# Altium PCB e-puck3-camera-2L-VL.PcbDoc
Units mm, origin at the board's own origin, x right, y up, seen from the top; angles counter-clockwise.
Board outline 7.8 x 15.9 mm, 4 copper layers (Top Layer, Layer 1, Layer 2, Bottom Layer), stack 0.603 mm thick; 8 components, 29 nets, 115 pads, 65 vias.
Unrouted connection lines stored in the file: 55.
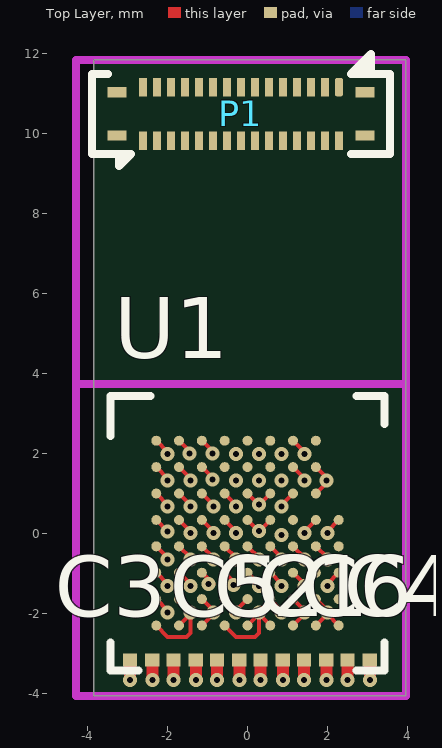
[diagram p0: Top Layer view]
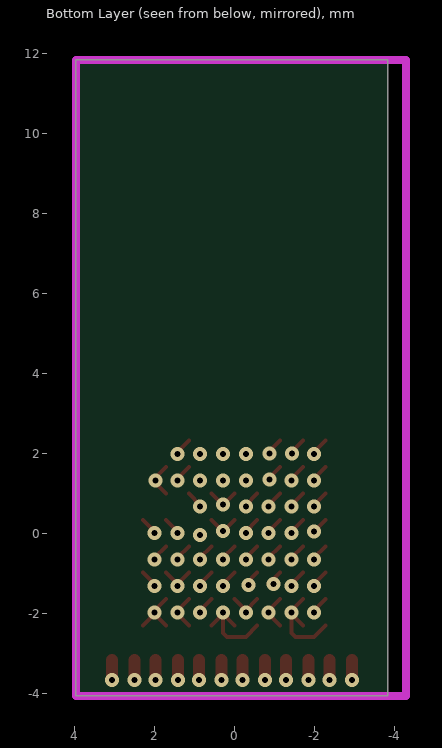
[diagram p1: Bottom Layer view, seen from below]
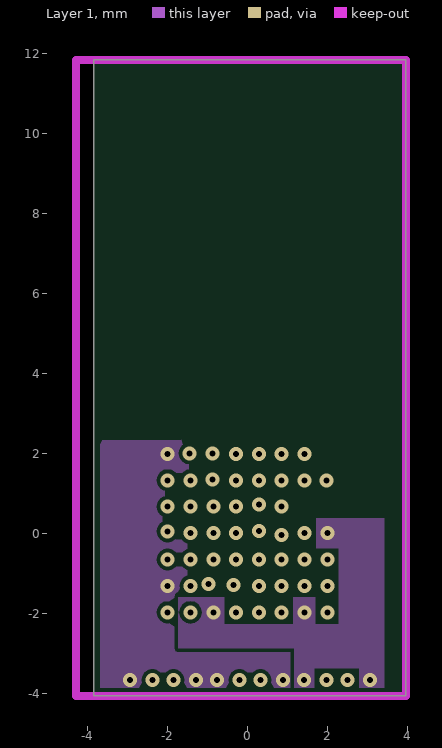
[diagram p2: Layer 1]

## Layer stack, top to bottom
Top Solder: solder mask 0.0102, Solder Resist, Dk 3.5
Top Layer: signal copper 0.0356
Dielectric 1: prepreg 0.0711, PP-006, Dk 4.1
Layer 1: signal copper 0.035
Dielectric1: dielectric 0.32, FR-4, Dk 4.8
Layer 2: signal copper 0.035
Dielectric 2: prepreg 0.0711, PP-006, Dk 4.1
Bottom Layer: signal copper 0.0356
Bottom Solder: solder mask 0.0102, Solder Resist, Dk 3.5

## Board outline
-3.838,-4.071 -3.838,11.829 3.962,11.829 3.962,-4.071

## Design rules (kind name [scope] priority, off if disabled: settings)
AcuteAngle [All] p1 off: minimum=8.80000000000000E+0001 checktracksonly=FALSE
Clearance Clearance_Normal [All] p1: gap=0.1 ignorepadtopadclearanceinfootprint=FALSE
ComponentClearance [All] p1: gap=0.2 collisioncheckmode=3 verticalgap=0.2 showdistances=FALSE
FabricationTestPointUsage TestPointUsage [All] p1: valid=0 allowmultiple=FALSE
FabricationTestpoint Testpoint [All] p1: side=3 testpointundercomponent=TRUE minsize=1.016 maxsize=2.54 preferedsize=1.524 minholesize=0 maxholesize=1.016 preferedholesize=0.813 testpointgrid=0.025 allowsidetop=TRUE allowsidebottom=TRUE usegrid=TRUE gridtolerance=0
Height [All] p1 off: minheight=0 maxheight=25.4 prefheight=12.7
HoleSize [All] p1: absolutevalues=TRUE maxlimit=6 minlimit=0.15 maxpercent=80.000 minpercent=20.000
MinimumAnnularRing [All] p1: minimumring=0.1
MinimumSolderMaskSliver [All] p1: minsoldermaskwidth=0.2
PlaneClearance [All] p1: clearance=0.4
PlaneConnect [All] p1: planeconnectstyle=Relief reliefexpansion=0.508 reliefentries=4 reliefconductorwidth=0.2 reliefairgap=0.254
PolygonConnect PolygonConnect_Via [IsVia] p1: connectstyle=Direct reliefconductorwidth=0.254 reliefentries=4 polygonreliefangle="90 Angle" airgapwidth=0.254
PolygonConnect [All] p2: connectstyle=Relief reliefconductorwidth=0.2 reliefentries=4 polygonreliefangle="90 Angle" airgapwidth=0.254
RoutingCorners [All] p1: cornerstyle=45-Degree minsetback=1 maxsetback=2.54
RoutingVias [All] p1: holewidth=0.3 width=0.6 viastyle="Through Hole" minholewidth=0.15 minwidth=0.35 maxholewidth=1 maxwidth=4
SMDToCorner [All] p1 off: distance=78740
SMDToPlane [All] p1 off: distance=118110
SilkToSilkClearance [All] p1: silktosilkclearance=0.2
SilkToSolderMaskClearance SilkscreenOverComponentPads [IsPad] p1: minsilkscreentomaskgap=0.2 clearancetoexposedcopper=TRUE
SolderMaskExpansion SolderMaskExpansion_Via [isVia] p1: expansion=-5
SolderMaskExpansion [All] p2: expansion=0.03
ViasUnderSMD [All] p1: allowed=FALSE
Width [All] p1: maxlimit=5 minlimit=0.1 preferedwidth=0.254 toplayer_prefwidth=0.1 midlayer1_minwidth=0.254 midlayer1_maxwidth=0.254 midlayer2_minwidth=0.254 midlayer2_maxwidth=0.254 bottomlayer_prefwidth=0.1 minimp=50.000000 maximp=50.000000 favimp=50.000000
19 further rules are at their usual default settings.

## Classes and differential pairs
net class HighFreq: D0 D1 D2 D3 D4 D5 D6 D7 D8 D9 D10 D11 HSYNC MCLK PIXCLK VSYNC
net class D[0..11]: D0 D1 D2 D3 D4 D5 D6 D7 D8 D9 D10 D11
net class DigitalPowers: D1V2 D3V0 DGND
net class AnalogPowers: A3V0 AGND

## Components (designator, comment, footprint, x,y, rotation, side; value= is the part's Value field where it differs from the comment)
C1 "4.7uF" CAPC0201(0603)33_L 0.606,-3.171 r0 top
C2 "100nF" CAPC0201(0603)33_L -0.482,-3.171 r180 top
C3 "4.7uF" CAPC0201(0603)33_L -2.658,-3.171 r180 top
C4 "4.7uF" CAPC0201(0603)33_L 2.782,-3.171 r0 top
C5 "100nF" CAPC0201(0603)33_L -1.57,-3.171 r0 top
C6 "100nF" CAPC0201(0603)33_L 1.694,-3.171 r180 top
P1 "HIROSE_BM23FR0.6-30DP-0.35V" HIROSE_BM23FR0.6-30DP-0.35V -0.163,10.479 r270 top
U1 "AR0144CS" ONSEMI-ODCSP69_570BBV 0,0 r0 top locked

## Footprints (in the part's own frame and the unit in brackets; to place one, negate y for a bottom-side part, rotate by r counter-clockwise, add the part's x,y. Pads: shape width x height; smd on the part's side, far side on the other; paste and mask are expansions set on the pad)
CAPC0201(0603)33_L [mm] "Chip Capacitor, Body 0.6x0.3mm, Height 0.33mm, IPC High Density"
  rect 0.36x0.32 smd: 1(-0.28,0) 2(0.28,0)
  body extent -0.32,-0.17 0.32,0.17, height 0.33
HIROSE_BM23FR0.6-30DP-0.35V [mm] "Hirose header BM23FR0.6 Serie, 30 leads, Plug Vertical SMT"
  rrect50% 0.46x0.2 smd mask+0.05: 1(-0.67,2.45)
  rect 0.46x0.2 smd mask+0.05: 2(-0.67,2.1) 3(-0.67,1.75) 4(-0.67,1.4) 5(-0.67,1.05) 6(-0.67,0.7) 7(-0.67,0.35) 8(-0.67,0) 9(-0.67,-0.35) 10(-0.67,-0.7) 11(-0.67,-1.05) 12(-0.67,-1.4) 13(-0.67,-1.75) 14(-0.67,-2.1) 15(-0.67,-2.45) 16(0.67,-2.45) 17(0.67,-2.1) 18(0.67,-1.75) 19(0.67,-1.4) 20(0.67,-1.05) 21(0.67,-0.7) 22(0.67,-0.35) 23(0.67,0) 24(0.67,0.35) 25(0.67,0.7) 26(0.67,1.05) 27(0.67,1.4) 28(0.67,1.75) 29(0.67,2.1) 30(0.67,2.45)
  rect 0.26x0.47 smd mask+0.05: P1(-0.54,3.1) P1(0.54,3.1) P2(-0.54,-3.1) P2(0.54,-3.1)
  silkscreen extent -1.5,-3.72 1.3,3.72, body extent -0.75,-3.48 0.75,3.47, height 0.52
ONSEMI-ODCSP69_570BBV [mm] "ODCSP69 5.545x5.565, CASE 570BV, ISSUE B"
  round 0.25 smd mask+0.065: A1(-2.28,2.31) A2(-1.71,2.31) A3(-1.14,2.31) A4(-0.57,2.31) A5(0,2.31) A6(0.57,2.31) A7(1.14,2.31) A8(1.71,2.31) B1(-2.28,1.65) B2(-1.71,1.65) B3(-1.14,1.65) B4(-0.57,1.65) B5(0,1.65) B6(0.57,1.65) B7(1.14,1.65) B8(1.71,1.65) C1(-2.28,0.99) C2(-1.71,0.99) C3(-1.14,0.99) C4(-0.57,0.99) C5(0,0.99) C6(0.57,0.99) C7(1.14,0.99) C8(1.71,0.99) D1(-2.28,0.33) D2(-1.71,0.33) D3(-1.14,0.33) D4(-0.57,0.33) D5(0,0.33) D6(0.57,0.33) D7(1.14,0.33) D8(1.71,0.33) D9(2.28,0.33) E1(-2.28,-0.33) E2(-1.71,-0.33) E3(-1.14,-0.33) E4(-0.57,-0.33) E5(0,-0.33) E6(0.57,-0.33) E7(1.14,-0.33) E8(1.71,-0.33) E9(2.28,-0.33) F1(-2.28,-0.99) F2(-1.71,-0.99) F3(-1.14,-0.99) F4(-0.57,-0.99) F5(0,-0.99) F6(0.57,-0.99) F7(1.14,-0.99) F8(1.71,-0.99) F9(2.28,-0.99) G1(-2.28,-1.65) G2(-1.71,-1.65) G3(-1.14,-1.65) G4(-0.57,-1.65) G5(0,-1.65) G6(0.57,-1.65) G7(1.14,-1.65) G8(1.71,-1.65) G9(2.28,-1.65) H1(-2.28,-2.31) H2(-1.71,-2.31) H3(-1.14,-2.31) H4(-0.57,-2.31) H5(0,-2.31) H6(0.57,-2.31) H7(1.14,-2.31) H8(1.71,-2.31) H9(2.28,-2.31)
  silkscreen extent -3.42,-3.43 3.42,3.43, body extent -2.77,-2.78 2.77,2.78, height 1.27

## Part data
C1 C3 C4: library part "TBD Capacitor[[/\]]0201[[/\]]1", "Capacitor TBD 0201", Case/Package=0201, Case Code (Metric)=0603, Currentie=CHF, Dielectric=X5R, Manufacturer=Murata, Manufacturer Part Number=GRM035R60J475ME15D, Max Operating Temperature=85°C, Min Operating Temperature=-55°C, Supplier Part Number 1=490-13230-1-ND, Tolerance=20%, Voltage Rating=6.3V, Capacitance=4.7uF, Case Code (Imperial)=0201, ComponentLink1Description=http://search.murata.co.jp/Ceramy/image/img/A01X/G101/ENG/GRM035R60J475ME15-01.pdf?src-supplier=Digi-Key, ComponentLink1URL=http://search.murata.co.jp/Ceramy/image/img/A01X/G101/ENG/GRM035R60J475ME15-01.pdf?src-supplier=Digi-Key, DateLastUpdate="2018-10-19 / 8:59:52 AM", Footprint Acort=0201, Length=0.024inch, Mount="Surface Mount", Packaging="Tape and Reel", Preference=1, Pricing 1="1=0.44000, 10=0.30700, 100=0.18420, 500=0.13818, 1000=0.11668, 2500=0.11054, 5000=0.10440 (USD)", ROHS=True, Size=0201, Stock 1=1746304, Supplier 1=Digi-Key, Thickness=0.022inch, Voltage Rating (DC)=6.3V, Width=0.012inch
C2 C5 C6: library part "TBD Capacitor[[/\]]0201[[/\]]1", "Capacitor TBD 0201", Currentie=CHF, DateLastUpdate="2018-10-19 / 8:59:52 AM", Footprint Acort=0201, Preference=1, ROHS=True, Size=0201
P1: library part HIROSE_BM23FR0.6-30DP-0.35V[[/\]]1, "2 x 15 Hirose header BM23FR0.6 Serie, 0.35 pitch, SMD, Mate at 0.6mm with receptacle, 0.3A signal contacts", Currentie=CHF, Manufacturer=Hirose, Manufacturer Nr=BM23FR0.6-30DP-0.35V, ComponentLink1Description="Supplier link", ComponentLink1URL=https://www.hirose.com/product/series/BM23FR?lang=en, DateLastUpdate="2019-09-24 / 11:10:53 AM", Footprint Acort=ToDefine, Orientation=Vertical, Preference=1, Price_1=1.03, Quant_1=1, ROHS=True, Supplier=Mouser, Supplier Nr=798-3FR0630DP035V895, Type=SMD
U1: library part AR0144CS[[/\]]1, "AR0144CS 1/4-inch 1.0 Mp CMOS Digital Image Sensor with Global Shutter", Currentie=CHF, Manufacturer=OnSemiconductor, Manufacturer Nr=ToDefine, ComponentLink1Description="OnSemiconductor link", ComponentLink1URL=https://www.onsemi.com/PowerSolutions/search.do?searchType=others&query=AR0144, DateLastUpdate="2019-09-20 / 2:14:32 PM", Footprint Acort=ToDefine, Preference=1, ROHS=True, Size=SOIC16, Supplier=Farnell, Supplier Nr=ToDefine

## Via types
v1: diameter 0.35, hole 0.15, Top Layer to Bottom Layer, tented both sides, 65 vias

## Nets (pads, with @x,y where several pads share a name; then routed paths per layer and width w, separated by ;. In a path a pad name is that pad's centre, name@x,y a point inside that pad or via, vN(x,y) a via of type N, cw(c..) or ccw(c..) an arc to the next point about the centre after c; other vN are vias at no path point)
/OE: P1.27 U1.D7
  other v1: 0.855,-0.045
/RST: P1.26 U1.G1 | length 0.4
  Top Layer w0.1: U1.G1 v1@-1.995,-1.935
  other v1: -1.995,-1.98
A3V0: C4.1 C6.1 P1.20 U1.G2 U1.G8 U1.H1 U1.H2 U1.H8 U1.H9 | length 4.6
  Top Layer w0.1: U1.H1 -1.994,-2.596 -1.523,-2.596 -1.425,-2.498 -1.425,-2.025 U1.H2 ; U1.G2 v1@-1.425,-1.935 ; U1.H8 v1@1.995,-2.025 ; U1.G8 1.995,-1.935 v1(1.995,-1.98) v1@1.995,-2.025 ; U1.H9 v1@1.995,-2.025
  Top Layer w0.3: v1(1.974,-3.671) C6.1 ; v1(2.502,-3.671) C4.1
  other v1: -1.425,-1.98
ADDR: P1.28 U1.B7 | length 0.4
  Top Layer w0.1: U1.B7 v1@1.425,1.365
  other v1: 1.425,1.32
AGND: C4.2 C6.2 P1.18 U1.D9 U1.G3 U1.G7 U1.H3 U1.H7 | length 3.1
  Top Layer w0.1: U1.H3 v1@-0.855,-2.025 ; U1.G3 v1@-0.855,-1.935 ; U1.H7 1.425,-2.025 v1(1.425,-1.98) 1.425,-1.935 U1.G7 ; v1@1.995,0.045 U1.D9
  Top Layer w0.3: v1(1.414,-3.671) C6.2 ; v1(3.062,-3.671) C4.2
  other v1: -0.855,-1.98 1.995,0
D0: P1.12 U1.F5 | length 0.4
  Top Layer w0.1: U1.F5 v1@0.285,-1.275
  other v1: 0.285,-1.32
D1: P1.11 U1.F4 | length 0.4
  Top Layer w0.1: U1.F4 v1@-0.285,-1.275
  other v1: -0.35,-1.3
D1V2: C1.1 C2.1 P1.21 U1.A3 U1.B2 U1.C5 U1.C6 U1.D8 U1.F2 U1.G4 U1.G5 U1.G6 | length 4.6
  Top Layer w0.1: U1.F2 v1@-1.425,-1.275 ; U1.B2 v1@-1.425,1.365 ; U1.A3 v1@-0.855,2.025 ; U1.G4 -0.285,-1.935 U1.G5 ; U1.C5 0.285,0.705 U1.C6 ; U1.G6 v1@0.855,-1.935 ; v1@1.425,0.045 U1.D8
  Top Layer w0.3: v1(-0.202,-3.671) C2.1 ; v1(0.326,-3.671) C1.1
  other v1: -0.285,-1.98 0.855,-1.98 -1.425,-1.32 1.425,0 0.285,0.71 -1.425,1.32 -0.875,1.995
D2: P1.10 U1.F3 | length 0.4
  Top Layer w0.1: U1.F3 v1@-0.855,-1.275
  other v1: -0.975,-1.275
D3: P1.9 U1.E5 | length 0.4
  Top Layer w0.1: U1.E5 v1@0.285,-0.615
  other v1: 0.285,-0.66
D3V0: C3.1 C5.1 P1.19 U1.A2 U1.B8 U1.C2 U1.C8 U1.E3 U1.F9 | length 3.4
  Top Layer w0.1: U1.C2 v1@-1.425,0.705 ; U1.A2 v1@-1.425,2.025 ; U1.E3 v1@-0.855,-0.615 ; U1.C8 v1@1.995,1.275 ; U1.B8 v1@1.995,1.365 ; v1@1.995,-1.275 U1.F9
  Top Layer w0.3: v1(-2.378,-3.671) C3.1 ; v1(-1.85,-3.671) C5.1
  other v1: 1.995,-1.32 -0.855,-0.66 -1.425,0.66 1.975,1.32 -1.445,1.995
D4: P1.8 U1.E4 | length 0.4
  Top Layer w0.1: U1.E4 v1@-0.285,-0.615
  other v1: -0.285,-0.66
D5: P1.7 U1.E1 | length 0.4
  Top Layer w0.1: U1.E1 v1@-1.995,-0.615
  other v1: -1.995,-0.66
D6: P1.6 U1.E2 | length 0.4
  Top Layer w0.1: U1.E2 v1@-1.425,-0.615
  other v1: -1.425,-0.66
D7: P1.5 U1.D1 | length 0.4
  Top Layer w0.1: U1.D1 v1(-1.995,0.045)
D8: P1.4 U1.D2 | length 0.4
  Top Layer w0.1: U1.D2 v1@-1.425,0.045
  other v1: -1.425,0
D9: P1.3 U1.D3 | length 0.4
  Top Layer w0.1: U1.D3 v1@-0.855,0.045
  other v1: -0.855,0
D10: P1.2 U1.D4 | length 0.4
  Top Layer w0.1: U1.D4 v1@-0.285,0.045
  other v1: -0.285,0
D11: P1.1 U1.C1 | length 0.4
  Top Layer w0.1: U1.C1 v1@-1.995,0.705
  other v1: -1.995,0.66
DGND: C1.2 C2.2 C3.2 C5.2 P1.17 P1.P1 P1.P2 U1.A1 U1.D5 U1.D6 U1.E8 U1.F1 U1.F7 U1.F8 U1.H4 U1.H5 U1.H6 | length 7.2
  Top Layer w0.1: U1.F1 v1@-1.995,-1.275 ; U1.A1 v1@-1.995,2.025 ; U1.H4 -0.284,-2.596 0.187,-2.596 0.285,-2.498 v1@0.285,-2.025 ; U1.H5 v1@0.285,-2.025 ; U1.D5 0.285,0.045 U1.D6 ; v1@0.285,-1.935 v1@0.285,-2.025 ; U1.H6 v1@0.285,-2.025 ; U1.F7 1.425,-1.275 U1.F8 ; U1.E8 v1@1.995,-0.615
  Top Layer w0.3: v1(-2.938,-3.671) C3.2 ; v1(-1.29,-3.671) C5.2 ; v1(-0.762,-3.671) C2.2 ; v1(0.886,-3.671) C1.2
  other v1: 0.285,-1.98 -1.995,-1.32 1.425,-1.32 1.995,-0.66 0.285,0.05 -1.995,1.98
FLASH: P1.22 U1.F6 | length 0.4
  Top Layer w0.1: U1.F6 v1@0.855,-1.275
  other v1: 0.855,-1.32
HSYNC: P1.14 U1.B1 | length 0.4
  Top Layer w0.1: U1.B1 v1@-1.995,1.365
  other v1: -1.995,1.32
MCLK: P1.16 U1.B3 | length 0.4
  Top Layer w0.1: U1.B3 v1@-0.855,1.365
  other v1: -0.875,1.335
PIXCLK: P1.15 U1.C3 | length 0.4
  Top Layer w0.1: U1.C3 v1@-0.855,0.705
  other v1: -0.855,0.66
SCL: P1.29 U1.C7 | length 0.4
  Top Layer w0.1: v1@0.855,0.705 U1.C7
  other v1: 0.855,0.66
SDA: P1.30 U1.E6 | length 0.4
  Top Layer w0.1: U1.E6 v1@0.855,-0.615
  other v1: 0.855,-0.66
SHUTTER: P1.23 U1.A7 | length 0.4
  Top Layer w0.1: U1.A7 v1@1.425,2.025
  other v1: 1.425,1.98
TRIG: P1.25 U1.E7 | length 0.4
  Top Layer w0.1: U1.E7 v1@1.425,-0.615
  other v1: 1.425,-0.66
VSYNC: P1.13 U1.C4 | length 0.4
  Top Layer w0.1: U1.C4 v1@-0.285,0.705
  other v1: -0.285,0.66
pads on no net: P1.24 U1.A4 U1.A5 U1.A6 U1.A8 U1.B4 U1.B5 U1.B6 U1.E9 U1.G9
copper on no net:
  other v1: -0.285,1.32 0.285,1.32 0.855,1.32 -0.285,1.98 0.285,1.98 0.855,1.98

## Polygon pours and split planes (outlines as drawn)
DGND on Layer 1 (solid, pour order 2): -3.625,2.325 -3.625,2.35 -3.675,2.3 -3.675,-4.025 1.2,-4.025 1.275,-4.1 1.275,-2.95 -1.8,-2.95 -1.8,-1.5 -0.888,-1.5 cw(c-0.888,-1.938) -0.45,-1.938 -0.45,-2.238 2.237,-2.238 2.237,-0.375 1.427,-0.375 1.427,2.35
AGND on Layer 1 (solid, pour order 0): -1.725,-1.6 -0.575,-1.6 -0.575,-2.275 1.15,-2.275 1.15,-1.6 1.698,-1.6 1.697,-2.275 2.282,-2.275 2.282,-0.375 1.725,-0.375 1.725,0.375 3.425,0.375 3.425,-3.875 2.8,-3.875 2.8,-3.375 1.675,-3.375 1.675,-3.975 1.175,-3.971 1.175,-2.875 -1.725,-2.875

## Keep-outs
Top Layer:
  lines w0.2: -4.288,3.729 3.962,3.729 ; -4.288,-4.071 3.962,-4.071 3.962,11.829 -4.288,11.829 -4.288,-4.071
Keep-Out Layer:
  lines w0.2: -4.288,-4.071 3.962,-4.071 3.962,11.829 -4.288,11.829 -4.288,-4.071

## Silkscreen, mask and mechanical layers (free items; w line width, h text height)
Top Solder:
  text ".Project_Name" at -7.375,-7.165 h2.5
  text "EPFL STI-IMT-LSRO1" at -6,-9.865 h1.4
  text "13.02.2008 - Rev 1.0 - DBR" at -8,-11.115 h1.4
Always:
  lines w0.01: -2.772,2.782 2.772,2.782
Never:
  lines w0.01: 2.562,-0.171 2.562,2.093 ; 5.062,-0.171 5.062,2.093 ; 7.562,-0.171 7.562,2.093 ; 10.062,-0.171 10.062,2.093 ; 12.562,-0.171 12.562,2.093 ; 15.062,-0.171 15.062,2.093 ; 20.112,-0.171 0.062,-0.171 ; 30.062,-30.171 ccw(c30.062,-0.171) 30.062,29.829 ; 30.062,-25.171 ccw(c30.062,-0.171) 30.062,24.829 ; 30.062,-20.171 ccw(c30.062,-0.171) 30.062,19.829 30.062,-0.171 ; 30.062,-15.171 ccw(c30.062,-0.171) 30.062,14.829 ; 0.062,-0.171 0.062,2.093 cw(c0.062,-0.171) 0.062,-2.435 0.062,-0.171
  lines w0.1: 30.062,-30.171 0.062,2.093 ; 30.062,29.829 0.062,-2.435 ; 0.062,-2.435 30.062,14.829 30.062,-15.171 0.062,2.093 ; 0.062,-2.435 30.062,19.829 30.062,24.829 0.062,-2.435 ; 0.062,2.093 30.062,-25.171 30.062,-20.171 0.062,2.093
TopCourtyard:
  lines w0.6: -3.538,-3.771 -3.538,3.429 3.662,3.429 3.662,-3.771 -3.538,-3.771
Drill Drawing:
  text ".Legend" at -12.438,-0.171 h2

## Text inside footprints (layer, text, board x,y; h text height)
U1: TopCourtyard "Mechanical" at 0.813,0.671 h0.5; TopCourtyard "Optical" at 0.788,-0.654 h0.5